# Altium PCB iNixie-Kit.pcbdoc
Units mm, origin at the board's own origin, x right, y up, seen from the top; angles counter-clockwise.
Board outline 73.3 x 71.5 mm, 2 copper layers (Top Layer, Bottom Layer); 77 components, 62 nets, 328 pads, 113 vias.
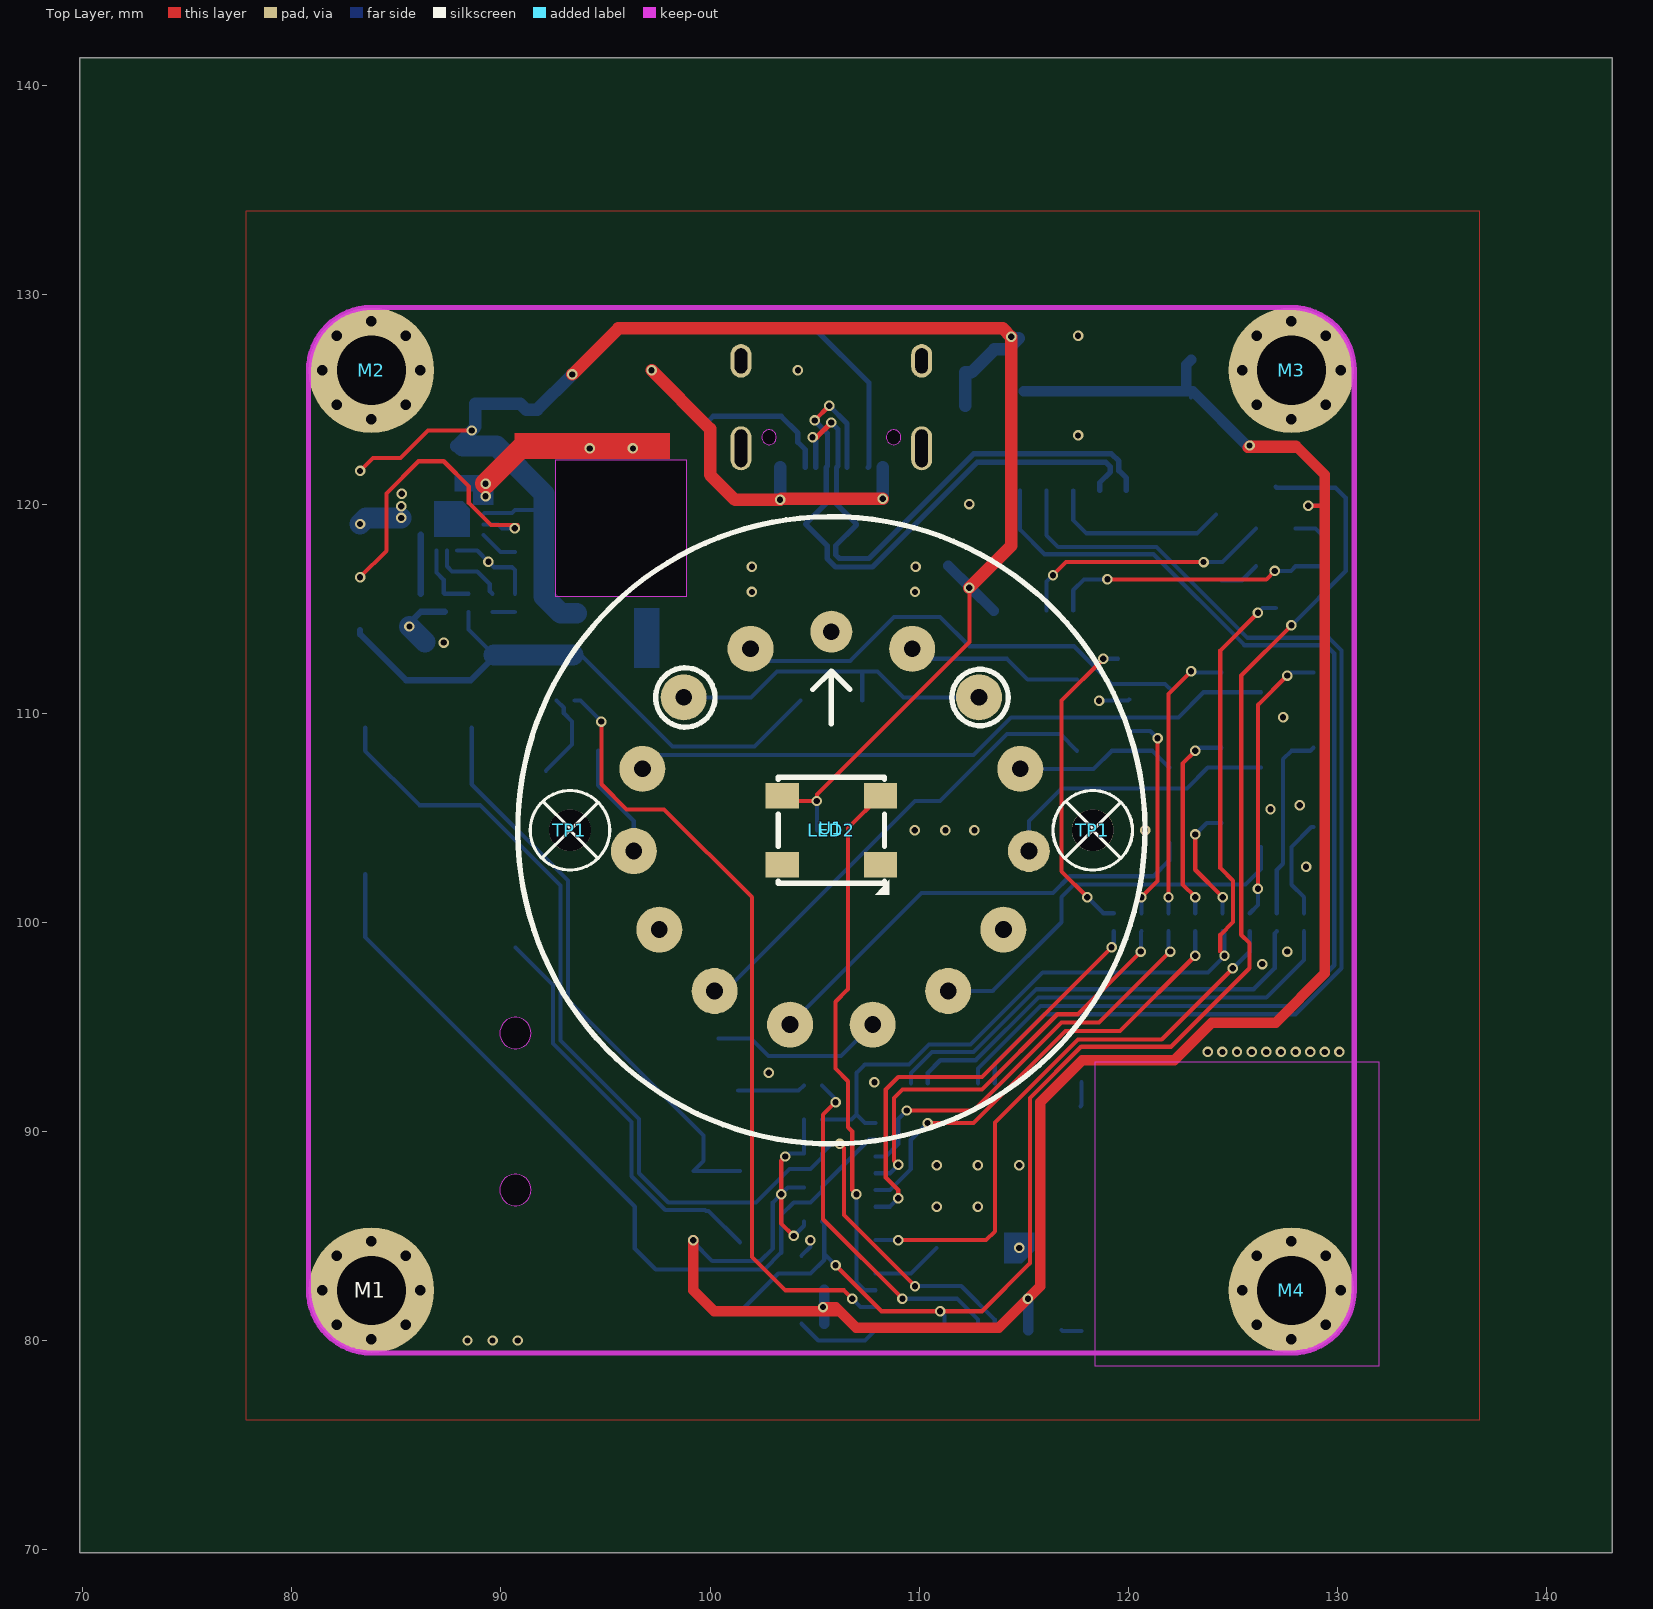
[diagram p0: Top Layer view]
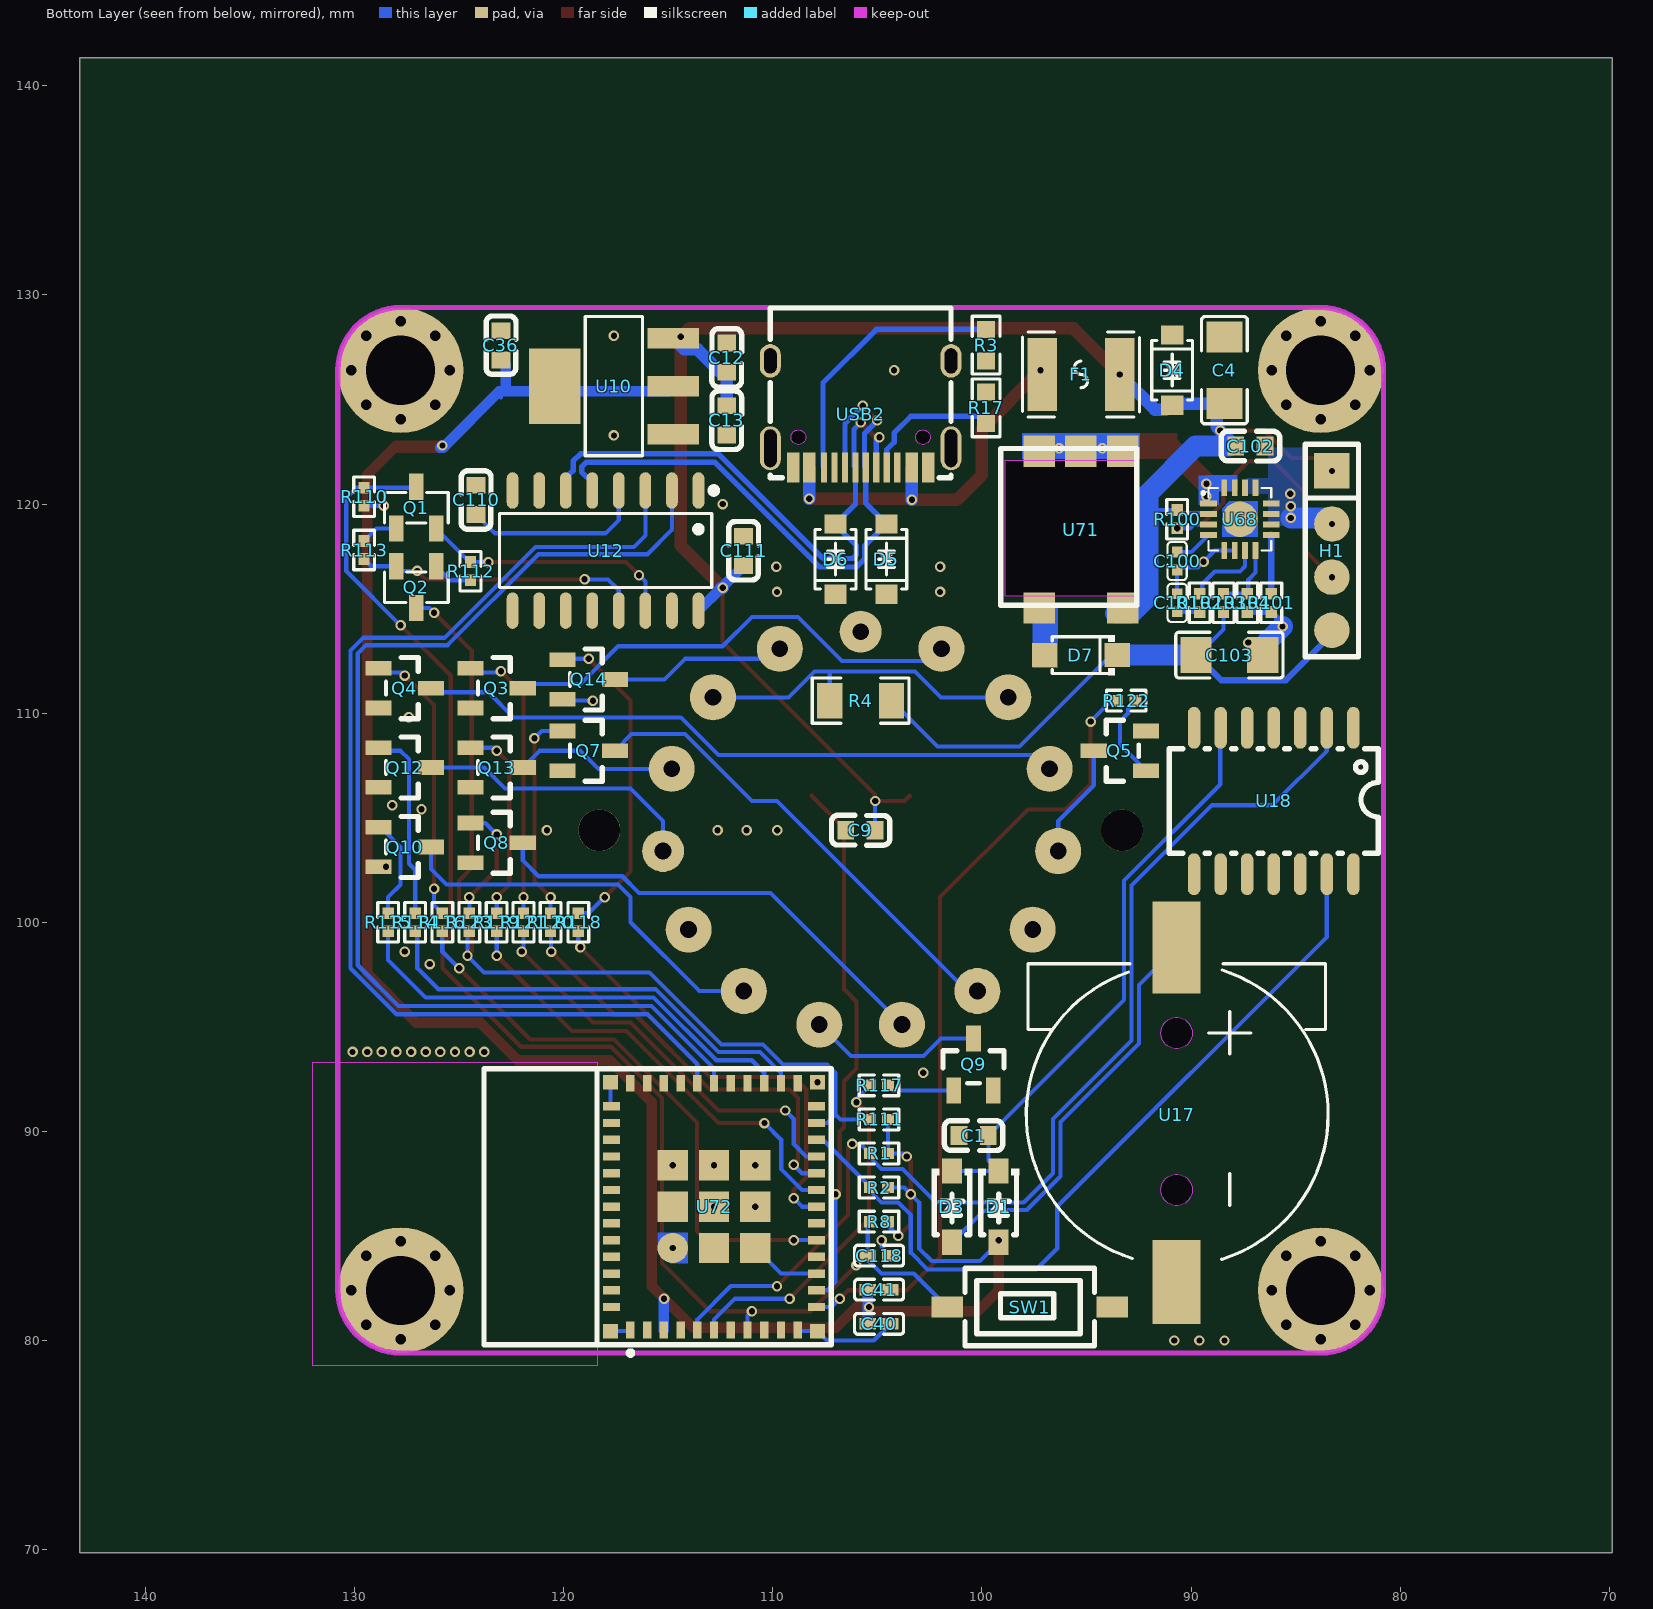
[diagram p1: Bottom Layer view, seen from below]

## Layer stack, top to bottom
Top Layer: signal copper (thickness not stored)
Dielectric: dielectric 0.32, FR-4, Dk 4.8
Bottom Layer: signal copper (thickness not stored)

## Board outline
143.15,69.85 69.85,69.85 69.85,141.35 143.15,141.35

## Components (designator, comment, footprint, x,y, rotation, side; value= is the part's Value field where it differs from the comment)
C1 "CL10A106MP8NNNC" C0603 100.392,89.8 r180 bottom
C4 "47uF" C1206 88.4,126.4 r270 bottom
C9 "0603B104K500NT" C0603 105.808,104.405 r0 bottom
C12 "0603B104K500NT" C0603 112.2,127 r90 bottom
C13 "0603B104K500NT" C0603 112.205,124 r270 bottom
C36 "CL10A106MP8NNNC" C0603 123,127.592 r270 bottom
C40 "CAP_0402" C0402#1 104.918,80.8 r0 bottom
C41 "CAP_0402" C0402#1 104.918,82.429 r0 bottom
C100 "C0402" C0402#2 90.664,117.276 r90 bottom
C101 "C0402" C0402#2 90.664,115.276 r270 bottom
C102 "CAP_0603" C0603 87.164,122.776 r0 bottom
C103 "CL31B105KBHNNNE" C1206 88.164,112.776 r0 bottom
C110 "CAP_0603" C0603 124.187,120.2 r90 bottom
C111 "CAP_0603" C0603 111.4,117.759 r270 bottom
C118 "22uf" C0402#1 104.918,84.057 r0 bottom
D1 "1N5819HW" SOD-123_L2.7-W1.6-LS3.7-RD-1 99.2,86.4 r270 bottom
D3 "1N5819HW" SOD-123_L2.7-W1.6-LS3.7-RD-1 101.432,86.4 r270 bottom
D4 "SMF5.0CA_C908214" SOD-123_L2.8-W1.8-LS3.7-BI 90.9,126.4 r270 bottom
D5 "SMF5.0CA_C908214" SOD-123_L2.8-W1.8-LS3.7-BI 104.571,117.362 r90 bottom
D6 "SMF5.0CA_C908214" SOD-123_L2.8-W1.8-LS3.7-BI 107,117.362 r90 bottom
D7 "E1J" SOD-123FL_L2.7-W1.8-LS3.7-RD 95.263,112.777 r0 bottom
F1 "1A自恢复保险丝" F1812 95.263,126.2 r0 bottom
H1 "HDR-M_2.54_1x4P" hdr-th_4p-p2.54-v-m 83.263,117.777 r270 bottom
LED2 "WS2812C" LED-SMD_4P-L5.0-W5.0-LS5.4-TL-1 105.8,104.4 r0 top
M1 "M3螺丝" 螺钉孔 83.8,82.4 r0 top
M2 "M3螺丝" 螺钉孔 83.8,126.4 r0 top
M3 "M3螺丝" 螺钉孔 127.8,126.4 r0 top
M4 "M3螺丝" 螺钉孔 127.8,82.4 r0 top
Q1 "SS8050_C2150" SOT-23-3_L2.9-W1.3-P1.90-LS2.4-BR 127.051,119.825 r270 bottom
Q2 "SS8050_C2150" SOT-23-3_L2.9-W1.3-P1.90-LS2.4-BR 127.051,116.025 r90 bottom
Q3 "A" SOT-23-3_L2.9-W1.6-P1.90-LS2.8-TR-CW 123.205,111.2 r0 bottom
Q4 "A" SOT-23-3_L2.9-W1.6-P1.90-LS2.8-TR-CW 127.6,111.2 r0 bottom
Q5 "A" SOT-23-3_L2.9-W1.6-P1.90-LS2.8-TR-CW 93.4,108.2 r180 bottom
Q7 "A" SOT-23-3_L2.9-W1.6-P1.90-LS2.8-TR-CW 118.8,108.2 r0 bottom
Q8 "A" SOT-23-3_L2.9-W1.6-P1.90-LS2.8-TR-CW 123.205,103.8 r0 bottom
Q9 "A" SOT-23-3_L2.9-W1.6-P1.90-LS2.8-TR-CW 100.4,93.2 r270 bottom
Q10 "A" SOT-23-3_L2.9-W1.6-P1.90-LS2.8-TR-CW 127.6,103.6 r0 bottom
Q12 "A" SOT-23-3_L2.9-W1.6-P1.90-LS2.8-TR-CW 127.6,107.4 r0 bottom
Q13 "A" SOT-23-3_L2.9-W1.6-P1.90-LS2.8-TR-CW 123.205,107.4 r0 bottom
Q14 "A" SOT-23-3_L2.9-W1.6-P1.90-LS2.8-TR-CW 118.8,111.612 r0 bottom
R1 "Res_0402" R0402 104.918,88.943 r180 bottom
R2 "Res_0402" R0402 104.918,87.314 r180 bottom
R3 "td03g5101bt" R0603 99.8,127.6 r90 bottom
R4 "6.8k" R1206 105.8,110.599 r180 bottom
R8 "Res_0402" R0402 104.918,85.686 r180 bottom
R17 "td03g5101bt" R0603 99.8,124.6 r270 bottom
R100 "Res_0402" R0402 90.664,119.276 r270 bottom
R101 "Res_0402" R0402 86.164,115.276 r270 bottom
R102 "Res_0402" R0402 89.588,115.276 r90 bottom
R103 "Res_0402" R0402 88.447,115.276 r270 bottom
R104 "Res_0402" R0402 87.305,115.276 r90 bottom
R110 "Res_0402" R0402 129.545,120.35 r90 bottom
R111 "Res_0402" R0402 104.918,90.571 r0 bottom
R112 "Res_0402" R0402 124.455,116.792 r90 bottom
R113 "Res_0402" R0402 129.545,117.8 r270 bottom
R114 "Res_0402" R0402 127.101,100 r90 bottom
R115 "Res_0402" R0402 128.396,100 r90 bottom
R116 "Res_0402" R0402 125.806,100 r90 bottom
R117 "Res_0402" R0402 104.918,92.2 r180 bottom
R118 "Res_0402" R0402 119.3,100 r90 bottom
R119 "Res_0402" R0402 123.205,100 r90 bottom
R120 "Res_0402" R0402 120.627,100 r90 bottom
R121 "Res_0402" R0402 121.922,100 r90 bottom
R122 "Res_0402" R0402 93.096,110.6 r180 bottom
R123 "Res_0402" R0402 124.511,100 r90 bottom
SW1 "Key_SMD_3.6x6.1x2.5" Key_SMD_3.6x6.1x2.5 97.711,81.6 r180 bottom
TP1 "M2螺丝" M2螺丝 93.3,104.4 r0 top
TP1 "M2螺丝" M2螺丝 118.3,104.4 r0 top
U1 "SD-01" SD-01 105.8,104.4 r90 top
U10 "AMS1117-3.3V" SOT-223-4_L6.5-W3.5-P2.30-LS7.0-BR 117.6,125.637 r180 bottom
U12 "CH340C" SOP-16_L10.0-W3.9-P1.27-LS6.0-BL 118,117.777 r0 bottom
U17 "CR1220-A" BAT-SMD_CR1220-2 90.69,90.8 r270 bottom
U18 "RX8025T-UC" SOIC-14_L10.1-W5.0-P1.27-LS7.4-BL 86.045,105.8 r0 bottom
U68 "TPS55340RTER" VQFN-16_L3.0-W3.0-P0.50-BL-EP1.7 87.664,119.276 r270 bottom
U71 "T3" T3 95.263,118.777 r90 bottom
U72 "ESP32-C3-MINI-1-H4_C2935306" WIFIM-SMD_ESP32-C3-MINI-1 112.81,86.4 r90 bottom
USB2 "typec-304-bcp16" USB-C-SMD_TYPEC-304-BCP16 105.8,124.3 r0 bottom

## Footprints (in the part's own frame and the unit in brackets; to place one, negate y for a bottom-side part, rotate by r counter-clockwise, add the part's x,y. Pads: shape width x height; smd on the part's side, far side on the other; paste and mask are expansions set on the pad)
BAT-SMD_CR1220-2 [mm]
  rect 4.4x2.3 smd: 1(-8,0)
  rect 4x2.3 smd: 2(8,0)
  Multi-Layer board cut-out: 3.6,-0.75 3.274,-0.676 3.013,-0.467 2.869,-0.167 2.869,0.167 3.013,0.468 3.274,0.676 3.6,0.75 3.6,0.75 3.925,0.676 4.186,0.468 4.331,0.167 4.331,-0.167 4.186,-0.467 3.925,-0.676 3.6,-0.75
  Multi-Layer board cut-out: -3.9,-0.75 -4.225,-0.676 -4.486,-0.467 -4.631,-0.167 -4.631,0.167 -4.486,0.468 -4.225,0.676 -3.9,0.75 -3.9,0.75 -3.575,0.676 -3.314,0.468 -3.169,0.167 -3.169,-0.167 -3.314,-0.467 -3.575,-0.676 -3.9,-0.75
  Multi-Layer keep-out region: 3.6,-0.75 3.274,-0.676 3.013,-0.467 2.869,-0.167 2.869,0.167 3.013,0.468 3.274,0.676 3.6,0.75 3.6,0.75 3.925,0.676 4.186,0.468 4.331,0.167 4.331,-0.167 4.186,-0.467 3.925,-0.676 3.6,-0.75
  Multi-Layer keep-out region: -3.9,-0.75 -4.225,-0.676 -4.486,-0.467 -4.631,-0.167 -4.631,0.167 -4.486,0.468 -4.225,0.676 -3.9,0.75 -3.9,0.75 -3.575,0.676 -3.314,0.468 -3.169,0.167 -3.169,-0.167 -3.314,-0.467 -3.575,-0.676 -3.9,-0.75
  silkscreen extent -7.22,-7.19 6.92,7.25
C0402#1 [mm]
  rect 0.79x0.54 smd: 1(-0.545,0) 2(0.545,0)
  silkscreen extent -1.17,-0.5 1.17,0.5
C0402#2 [mm]
  rect 0.508x0.508 smd: 1(-0.432,0) 2(0.432,0)
  silkscreen extent -0.91,-0.46 0.91,0.46
C0603 [mm]
  rect 0.8x0.9 smd: 1(-0.7,0) 2(0.7,0)
  silkscreen extent -1.41,-0.71 1.39,0.72
C1206 [mm]
  rect 1.485x1.728 smd: 1(-1.593,0) 2(1.593,0)
  silkscreen extent -2.56,-1.09 2.56,1.09
F1812 [mm]
  rect 1.407x3.499 smd: 1(-1.853,0) 2(1.853,0)
  silkscreen extent -2.79,-2.03 2.79,2.03
hdr-th_4p-p2.54-v-m [mm]
  rect 1.7x1.7 smd: 1(-3.81,0)
  round 1.7 smd: 2(-1.27,0) 3(1.27,0) 4(3.81,0)
  silkscreen extent -5.08,-1.27 5.08,1.27
Key_SMD_3.6x6.1x2.5 [mil]
  rect 59.1x39.4 smd: 1(-155.5,0) 2(155.5,0)
  silkscreen extent -122,-73 122,73
LED-SMD_4P-L5.0-W5.0-LS5.4-TL-1 [mm]
  rect 1.6x1.2 smd: 1(-2.35,1.65) 2(-2.35,-1.65) 3(2.35,-1.65) 4(2.35,1.65)
  silkscreen extent -2.54,-3.09 2.77,2.54
M2螺丝 [mm]
  round 2 hole 2: 1(0,0)
  silkscreen extent -1.9,-1.9 1.9,1.9
R0402 [mm]
  rect 0.566x0.54 smd: 1(-0.433,0) 2(0.433,0)
  silkscreen extent -0.94,-0.5 0.94,0.5
R0603 [mm]
  rect 0.806x0.864 smd: 1(-0.753,0) 2(0.753,0)
  silkscreen extent -1.39,-0.66 1.39,0.66
R1206 [mm]
  rect 1.208x1.701 smd: 1(-1.479,0) 2(1.479,0)
  silkscreen extent -2.31,-1.08 2.31,1.08
SD-01 [mm]
  round 2 hole 0.8: 1(9.5,0) 12(-0.993,-9.448)
  round 2.2 hole 0.8 copper offset 0,0: 2(8.68,3.864) 7(-7.686,5.584) 8(-9.292,1.975) 9(-9.292,-1.975) 13(2.936,-9.035) 15(8.679,-3.864)
  round 2.2 hole 0.8: 3(6.357,7.06) 4(2.936,9.035) 5(-0.993,9.448) 6(-4.75,8.227) 10(-7.686,-5.584) 11(-4.75,-8.227) 14(6.357,-7.06)
  silkscreen extent -15,-15 15,15
SOD-123_L2.7-W1.6-LS3.7-RD-1 [mm]
  rect 1.2x0.95 smd: 1(-1.7,0) 2(1.7,0)
  silkscreen extent -1.81,-0.98 1.35,0.98
SOD-123_L2.8-W1.8-LS3.7-BI [mm]
  rect 0.93x1.06 smd: 1(1.685,0) 2(-1.685,0)
  silkscreen extent -1.43,-0.98 1.43,0.98
SOD-123FL_L2.7-W1.8-LS3.7-RD [mm]
  rect 1.2x1.15 smd: 1(-1.735,0) 2(1.735,0)
  silkscreen extent -1.6,-0.95 1.38,0.95
SOIC-14_L10.1-W5.0-P1.27-LS7.4-BL [mm]
  oval 0.6x2 smd: 1(-3.81,-3.5) 2(-2.54,-3.5) 3(-1.27,-3.5) 4(0,-3.5) 5(1.27,-3.5) 6(2.54,-3.5) 7(3.81,-3.5) 8(3.81,3.5) 9(2.54,3.5) 10(1.27,3.5) 11(0,3.5) 12(-1.27,3.5) 13(-2.54,3.5) 14(-3.81,3.5)
  silkscreen extent -5,-2.5 5,2.5
SOP-16_L10.0-W3.9-P1.27-LS6.0-BL [mm]
  oval 0.56x1.745 smd: 1(-4.445,-2.872) 2(-3.175,-2.872) 3(-1.905,-2.872) 4(-0.635,-2.872) 5(0.635,-2.872) 6(1.905,-2.872) 7(3.175,-2.872) 8(4.445,-2.872) 9(4.445,2.872) 10(3.175,2.872) 11(1.905,2.872) 12(0.635,2.872) 13(-0.635,2.872) 14(-1.905,2.872) 15(-3.175,2.872) 16(-4.445,2.872)
  silkscreen extent -5.33,-3.02 5.08,1.77
SOT-23-3_L2.9-W1.3-P1.90-LS2.4-BR [mm]
  rect 1.25x0.7 smd: 1(1,-0.95) 2(1,0.95) 3(-1,0)
  silkscreen extent -0.73,-1.53 0.73,1.53
SOT-23-3_L2.9-W1.6-P1.90-LS2.8-TR-CW [mm]
  rect 1.25x0.7 smd: 1(1.25,0.95) 2(1.25,-0.95) 3(-1.25,0)
  silkscreen extent -0.65,-1.46 0.9,1.46
SOT-223-4_L6.5-W3.5-P2.30-LS7.0-BR [mm]
  rect 2.47x0.98 smd: 1(2.835,-2.3) 2(2.835,0) 3(2.835,2.3)
  rect 2.47x3.6 smd: 4(-2.835,0)
  silkscreen extent -1.37,-3.33 1.37,3.33
T3 [mm]
  rect 1.5x1.5 smd: 1(3.75,2) 2(-3.75,-2) 3(3.75,0.006) 4(-3.75,2) 5(3.75,-2)
  Multi-Layer board cut-out: -3.178,-2.67 -3.178,3.63 3.322,3.63 3.322,-2.67
  Multi-Layer keep-out region: -3.178,-2.67 -3.178,3.63 3.322,3.63 3.322,-2.67
  silkscreen extent -3.62,-2.67 3.88,3.83
USB-C-SMD_TYPEC-304-BCP16 [mil]
  oval 39.4x82.7 hole 23.6 slot 70.9 at 90 deg: 13(-170.1,64.3) 14(170.1,64.3)
  oval 39.4x63 hole 23.6 slot 47.2 at 90 deg: 15(-170.1,-100.3) 16(170.1,-100.3)
  rect 23.6x57.1 smd: A1B12(-127,100.3) A4B9(-96.5,100.3) B1A12(126.8,100.3) B4A9(96.5,100.3)
  rect 11.8x57.1 smd: A5(-49.2,100.3) A6(-9.8,100.3) A7(9.8,100.3) A8(49.2,100.3) B5(68.9,100.3) B6(29.5,100.3) B7(-29.5,100.3) B8(-68.9,100.3)
  Multi-Layer board cut-out: 131.1,43.4 129.73,37.41 125.9,32.61 120.37,29.95 114.23,29.95 108.7,32.61 104.87,37.41 103.5,43.4 103.5,43.4 104.87,49.39 108.7,54.19 114.23,56.85 120.37,56.85 125.9,54.19 129.73,49.39 131.1,43.4
  Multi-Layer board cut-out: -103.5,43.4 -104.87,37.41 -108.7,32.61 -114.23,29.95 -120.37,29.95 -125.9,32.61 -129.73,37.41 -131.1,43.4 -131.1,43.4 -129.73,49.39 -125.9,54.19 -120.37,56.85 -114.23,56.85 -108.7,54.19 -104.87,49.39 -103.5,43.4
  Multi-Layer keep-out region: 131.1,43.4 129.73,37.41 125.9,32.61 120.37,29.95 114.23,29.95 108.7,32.61 104.87,37.41 103.5,43.4 103.5,43.4 104.87,49.39 108.7,54.19 114.23,56.85 120.37,56.85 125.9,54.19 129.73,49.39 131.1,43.4
  Multi-Layer keep-out region: -103.5,43.4 -104.87,37.41 -108.7,32.61 -114.23,29.95 -120.37,29.95 -125.9,32.61 -129.73,37.41 -131.1,43.4 -131.1,43.4 -129.73,49.39 -125.9,54.19 -120.37,56.85 -114.23,56.85 -108.7,54.19 -104.87,49.39 -103.5,43.4
  silkscreen extent -170,-200 170,120
VQFN-16_L3.0-W3.0-P0.50-BL-EP1.7 [mm]
  rect 0.28x0.8 smd: 1(-0.749,-1.5) 2(-0.249,-1.5) 3(0.249,-1.5) 4(0.749,-1.5) 9(0.749,1.5) 10(0.249,1.5) 11(-0.249,1.5) 12(-0.749,1.5)
  rect 0.8x0.28 smd: 5(1.5,-0.749) 6(1.5,-0.249) 7(1.5,0.249) 8(1.5,0.749) 13(-1.5,0.749) 14(-1.5,0.249) 15(-1.5,-0.249) 16(-1.5,-0.749)
  round 1.7 smd: 17(0,0)
  Top Layer region: -0.85,-0.5 -0.85,0.85 0.85,0.85 0.85,-0.85 -0.5,-0.85
  silkscreen extent -1.5,-1.76 1.5,1.5
WIFIM-SMD_ESP32-C3-MINI-1 [mm]
  rect 0.8x0.4 smd: 1(-5.9,4) 2(-5.9,3.2) 3(-5.9,2.4) 4(-5.9,1.6) 5(-5.9,0.8) 6(-5.9,0) 7(-5.9,-0.8) 8(-5.9,-1.6) 9(-5.9,-2.4) 10(-5.9,-3.2) 11(-5.9,-4) 25(5.9,-4) 26(5.9,-3.2) 27(5.9,-2.4) 28(5.9,-1.6) 29(5.9,-0.8) 30(5.9,0) 31(5.9,0.8) 32(5.9,1.6) 33(5.9,2.4) 34(5.9,3.2) 35(5.9,4)
  rect 0.4x0.8 smd: 12(-4.8,-4.9) 13(-4,-4.9) 14(-3.2,-4.9) 15(-2.4,-4.9) 16(-1.6,-4.9) 17(-0.8,-4.9) 18(0,-4.9) 19(0.8,-4.9) 20(1.6,-4.9) 21(2.4,-4.9) 22(3.2,-4.9) 23(4,-4.9) 24(4.8,-4.9) 36(4.8,4.9) 37(4,4.9) 38(3.2,4.9) 39(2.4,4.9) 40(1.6,4.9) 41(0.8,4.9) 42(0,4.9) 43(-0.8,4.9) 44(-1.6,4.9) 45(-2.4,4.9) 46(-3.2,4.9) 47(-4,4.9) 48(-4.8,4.9)
  rect 1.45x1.45 smd: 49(-1.975,-1.975) 49(-1.975,0) 49(0,-1.975) 49(0,0) 49(0,1.975) 49(1.975,-1.975) 49(1.975,0) 49(1.975,1.975)
  round 1.45 smd: 49(-1.975,1.975)
  rect 0.7x0.7 smd: 50(5.95,4.95) 51(5.95,-4.95) 52(-5.95,-4.95) 53(-5.95,4.95)
  Top Layer region: -2.7,2.1 -2.1,2.7 -1.25,2.7 -1.25,1.25 -2.7,1.25
  silkscreen extent -7.1,-5.6 6.6,11
螺钉孔 [mm]
  round 6 hole 3.302: 1(0,0)
  round 1 hole 0.5: 2(0,2.349) 3(0,-2.35) 4(2.349,0) 5(-2.35,0) 6(1.651,1.651) 7(-1.651,-1.651) 8(1.651,-1.651) 9(-1.651,1.651)

## Via types
v1: diameter 0.5, hole 0.3, Top Layer to Bottom Layer, 113 vias

## Nets (pads, with @x,y where several pads share a name; then routed paths per layer and width w, separated by ;. In a path a pad name is that pad's centre, name@x,y a point inside that pad or via, vN(x,y) a via of type N, cw(c..) or ccw(c..) an arc to the next point about the centre after c; other vN are vias at no path point)
$1N272: C1.2 D1.1 D3.1 U18.6 | length 28.2
  Bottom Layer w0.2: U18.6 88.6,109.285 88.6,106.6 93.2,102 93.2,96.292 C1.2 99.692,88.592 D1.1 D3.1
$1N3351: D3.2 U17.1 | length 19.7
  Bottom Layer w0.2: U17.1 92.495,96.994 92.495,94.206 96.248,90.454 96.248,87.854 97.854,86.248 99.752,86.248 99.8,86.2 99.932,86.2 D3.2
$1N18606: F1.2 USB2.A4B9 USB2.B4A9 | length 18
  Top Layer w0.6: v1(97.2,126.4) 100,123.6 100,121.4 101.2,120.2 v1(103.349,120.2) 103.4,120.251 v1(108.251,120.251)
  Bottom Layer w0.6: v1(103.349,120.2) USB2.A4B9 ; v1(108.251,120.251) USB2.B4A9@108.251,121.751
$1N54126: C110.1 U12.4 | length 8.9
  Bottom Layer w0.2: U12.4 117.365,119.235 118,118.6 123.287,118.6 C110.1
$1N54151: Q2.1 R112.1 | length 1.9
  Bottom Layer w0.2: R112.1 125.435,116.359 Q2.1
$1N54152: Q1.1 R113.1 | length 1.8
  Bottom Layer w0.2: Q1.1 128.953,118.825 R113.1
$2N51628: Q10.3 U1.10 | length 19.1
  Bottom Layer w0.2: U1.10 113.514,96.714 116.8,100 116.8,101.2 117.4,101.8 125.6,101.8 126.35,102.55 Q10.3
$2N54349: Q3.3 U1.2 | length 22.5
  Bottom Layer w0.2: U1.2 102.516,112.5 106.7,112.5 108.8,114.6 111,114.6 112.4,113.2 117.4,113.2 119.2,111.4 121.755,111.4 Q3.3
$2N54351: Q4.3 U1.4 | length 31.1
  Bottom Layer w0.2: U1.4@96.765,107.336 97.429,108 112.6,108 114.4,109.8 122.4,109.8 123.6,111 Q4.3@126.35,111
$2N54353: Q5.3 U1.5 | length 5.5
  Bottom Layer w0.2: Q5.3 94.65,106.55 96.352,104.848 U1.5
$2N54355: Q7.3 U1.7 | length 22.8
  Bottom Layer w0.2: U1.7 100.714,96.714 109.8,105.8 111,105.8 114.2,109 116.75,109 Q7.3
$2N54357: Q8.3 U1.8 | length 22.2
  Bottom Layer w0.2: U1.8 110.117,101.4 116.4,101.4 117.2,102.2 121.2,102.2 121.955,102.955 Q8.3
$2N54359: Q9.3 U1.9 | length 8.4
  Bottom Layer w0.2: Q9.3 101.95,94.45 102.8,93.6 106.267,93.6 U1.9
$2N54361: Q12.3 U1.12 | length 13.6
  Bottom Layer w0.2: U1.12 115.248,104.848 116.8,106.4 122.8,106.4 123.8,107.4 Q12.3
$2N54363: Q13.3 U1.13 | length 7.8
  Bottom Layer w0.2: U1.13 118.342,107.336 119.206,108.2 121.155,108.2 Q13.3
$2N54365: Q14.3 U1.15 | length 8.5
  Bottom Layer w0.2: U1.15 110.143,112.6 114.2,112.6 115.188,111.612 Q14.3
$2N56740: R4.1 U1.3 U1.14 | length 16.6
  Bottom Layer w0.2: U1.3 101.957,110.757 103.2,112 107.229,112 ; R4.1 107.279,111.951 107.229,112 ; U1.14 109.243,110.757 108,112 107.229,112
$4N509: R101.1 U68.9 | length 2.8
  Bottom Layer w0.3: R101.1 U68.9
$4N511: C101.2 R102.1 | length 1.1
  Bottom Layer w0.2: R102.1 C101.2
$4N513: R102.2 U68.7 | length 3.7
  Bottom Layer w0.2: U68.7 87.414,117.026 87.663,116.777 88.863,116.777 89.463,116.177 89.463,115.834 R102.2
$4N515: C100.2 U68.4 | length 1.8
  Bottom Layer w0.2: U68.4 89.982,117.708 C100.2
$4N550: R103.1 R104.2 U68.8 | length 3.4
  Bottom Layer w0.2: U68.8 86.914,116.726 87.263,116.377 87.263,115.751 R104.2 R103.1
$4N558: D7.2 U71.4
$4N560: U68.1 U68.15 U68.16 U71.1 U71.3 | length 2.9
  Top Layer w1: v1(89.263,120.977) 91.063,122.777 91.463,122.777
  other v1: 89.263,120.377 94.247,122.661 96.312,122.661
+3.3V: C36.2 C40.2 C41.2 D1.2 R1.2 R2.2 R8.2 R110.1 R111.1 U10.2 U10.4 U72.3 | length 112.1
  Top Layer w0.2: v1(103.6,88.8) 103.4,88.6 v1(103.4,87) 103.4,85.6 v1(104,85) ; v1(128.6,119.917) 129.329,119.917 129.4,119.846
  Top Layer w0.5: v1(99.2,84.8) 99.2,82.4 100.2,81.4 106.2,81.4 ; v1(105.4,81.6) 106,81.6 106.2,81.4 ; 106.2,81.4 107,80.6 113.8,80.6 v1(115.2,82) 115.8,82.6 115.8,91.4 117.8,93.4 122.2,93.4 124,95.2 127.045,95.2 129.4,97.555 129.4,119.846 129.4,121.4 128.1,122.7 ; 128.1,122.7 125.7,122.7 v1(125.8,122.8) 128,122.8 128.1,122.7
  Bottom Layer w0.2: D1.2 100.1,83.8 102.4,83.8 103,84.4 103,86.6 v1(103.4,87) 103.714,87.314 R2.2 ; v1(103.6,88.8) 103.743,88.943 R1.2 R111.1 ; v1(104,85) 104.486,85.486 R8.2 ; 122.995,125.1 123,125.105 123,125.4 ; v1(128.6,119.917) R110.1
  Bottom Layer w0.5: D1.2 v1(99.2,84.8) ; v1(105.4,81.6) 105.4,81.588 v1@105.464,81.525 ; C40.2 v1@105.464,81.525 ; C41.2 v1@105.464,81.525 ; U10.2@115.004,125.4 120.674,125.4 122.774,125.4 ; v1(115.2,82) 115.21,81.99 U72.3 ; C36.2 122.774,126.666 122.774,125.4 ; v1(125.8,122.8) 125.9,122.7 125.773,122.7 123.073,125.4 123,125.4 122.774,125.4
+5V: C4.2 C9.1 C12.1 C13.1 C102.2 C111.2 D4.1 F1.1 H1.1 LED2.1 R100.1 U10.3 U12.16 U68.2 U71.2 | length 88.3
  Top Layer w0.2: v1(83.263,121.587) 83.877,122.2 85.2,122.2 86.517,123.517 v1(88.604,123.517) ; LED2.1 103.7,105.8 v1(105.108,105.8) 105.108,106.108 112.4,113.4 v1(112.4,116)
  Top Layer w0.6: v1(93.41,126.2) 95.61,128.4 114,128.4 v1(114.4,128) 114.4,118 v1(112.4,116)
  Bottom Layer w0.2: U68.2 89.215,119.577 90.531,119.577 R100.1 91.939,119.709 92.063,119.585 ; C9.1 v1(105.108,105.8)
  Bottom Layer w0.5: C111.2 112.477,115.982 U12.16
  Bottom Layer w0.6: C102.2 88.774,123.687 88.774,124.807 90.915,124.807 91.207,124.515 91.725,124.515 v1(93.41,126.2) ; C13.1 112.2,124.705 C12.1 112.5,126.3 113.6,127.4 114.228,127.4 U10.3 114.463,127.938 v1(114.4,128) ; v1(112.4,116) 112.418,115.982 v1@112.477,115.982
  Bottom Layer w1: C102.2@88.184,122.776 89.779,122.776 92.063,120.492 92.063,119.585 92.063,115.577 92.863,114.777 U71.2@93.614,114.777
CC1: R17.2 USB2.A5 | length 6.7
  Bottom Layer w0.254: R17.2 100.153,124.2 103.4,124.2 104.2,123.4 104.2,122.955 104.55,122.605 USB2.A5
CC2: R3.2 USB2.B5 | length 12.9
  Bottom Layer w0.254: R3.2 105.047,128.353 107.6,125.8 107.6,121.802 USB2.B5
CHIP_EN: C118.2 Q1.3 R8.1 R110.2 SW1.1 U72.8 | length 68.8
  Top Layer w0.2: v1(106,83.6) 108.2,81.4 v1(111,81.4) 113,81.4 115.298,83.698 115.298,91.599 117.746,94.048 122.048,94.048 125.8,97.8 125.8,99 125.4,99.4 125.4,111.8 v1(127.8,114.2)
  Bottom Layer w0.2: SW1.1 103.26,83.2 104.8,83.2 105.464,83.864 C118.2 ; R8.1 105.464,85.573 C118.2 ; v1(106,83.6) 105.543,84.057 C118.2 ; v1(111,81.4) 111.21,81.19 U72.8 ; Q1.3 127.093,120.782 R110.2 129.915,120.782 130.4,120.298 130.4,116.8 v1(127.8,114.2)
D+: D5.1 U12.5 USB2.A6 USB2.B6 | length 29.3
  Top Layer w0.2: v1(105,124) v1(105.7,124.7)
  Bottom Layer w0.2: v1@105.6,124.7 v1(105.7,124.7)
  Bottom Layer w0.254: v1(105,124) 105.62,123.38 105.62,121.821 USB2.A6 105.551,120.027 D5.1 105.6,118.018 105.6,117.4 106.006,116.994 107.768,116.994 112.568,121.794 ; v1(105.7,124.7) 106.549,123.851 USB2.B6 ; 112.6,121.794 112.568,121.794 ; U12.5 118.635,121.035 119.141,121.541 119.141,121.778 118.925,121.994 112.768,121.994 112.568,121.794
D-: D6.1 U12.6 USB2.A7 USB2.B7 | length 27.4
  Top Layer w0.254: v1(104.9,123.2) 105.1,123.2 v1(105.8,123.9)
  Bottom Layer w0.254: v1(104.9,123.2) 105.051,123.049 USB2.B7 ; v1(105.8,123.9) 106.12,123.58 106.12,121.823 USB2.A7 106.049,119.998 D6.1 107,119 106.006,118.006 106.006,117.575 106.181,117.4 107.6,117.4 112.6,122.4 119.2,122.4 119.547,122.053 119.547,121.6 119.905,121.242 U12.6
DTR: Q2.2 R113.2 U12.13 | length 13.8
  Top Layer w0.2: v1(119,116.4) 126.6,116.4 v1(127,116.8)
  Bottom Layer w0.2: U12.13 117.365,115.877 117.888,116.4 v1(119,116.4) ; v1(127,116.8) 127.776,116.8 Q2.2 129.203,117.025 R113.2
ESP32_TX: U12.3 U72.31 | length 53.1
  Bottom Layer w0.2: U72.31 113.61,93.21 116,95.6 128,95.6 130.2,97.8 130.2,113 129.597,113.603 125.695,113.603 121.346,117.952 116.648,117.952 116.095,118.505 U12.3
ESP33_RX: U12.2 U72.30 | length 54.1
  Bottom Layer w0.2: U72.30 112.81,93.01 115.8,96 127.902,96 129.848,97.946 129.848,112.854 129.451,113.251 125.549,113.251 121.2,117.6 116,117.6 114.825,118.775 U12.2
GATE: H1.3 R100.2 U68.3 | length 14.7
  Top Layer w0.2: v1(83.263,116.507) 84.52,117.763 84.52,120.503 86.063,122.047 87.263,122.047 88.463,120.847 88.463,120.047 89.518,118.992 v1@90.794,118.992
  Bottom Layer w0.2: U68.3 89.863,119.027 90.047,118.844 v1(90.664,118.844)
GND: C1.1 C4.1 C9.2 C12.2 C13.2 C36.1 C40.1 C41.1 C100.1 C101.1 C102.1 C103.1 C110.2 C111.1 C118.1 D4.2 D5.2 D6.2 H1.2 LED2.3 Q3.1 Q4.1 Q5.1 Q7.1 Q8.1 Q9.1 Q10.1 Q12.1 Q13.1 Q14.1 R3.1 R17.1 R101.2 R104.1 SW1.2 U10.1 U12.1 U17.2 U18.11 U68.5 U68.6 U68.10 U68.11 U68.12 U68.13 U68.14 U72.1 U72.2 U72.11 U72.14 U72.36 U72.37 U72.38 U72.39 U72.40 U72.41 U72.42 U72.43 U72.44 U72.45 U72.46 U72.47 U72.48 U72.49 U72.50 U72.51 U72.52 U72.53 USB2.A1B12 USB2.B1A12 | length 22.4
  Bottom Layer w0.2: U68.6 U68.5 88.864,117.776 v1(89.401,117.239) 89.663,116.977 90.532,116.977 C100.1 C101.1 ; C40.1 105.173,80 107.41,80 U72.52 108.76,80.45 U72.11 ; C118.1 104.8,84.484 v1(104.8,84.8) ; U72.14 109.61,83.2 U72.49@110.834,84.425 ; U72.1 116.86,80.45 U72.53 ; U72.36 117.76,91.25 U72.50 ; v1(118.6,110.6) 119.987,110.6 120.035,110.648 Q14.1@120.05,110.648
  Bottom Layer w0.3: v1(85.624,114.146) 85.624,114.305 R101.2 R104.1
  Bottom Layer w1: v1(83.263,119.047) 83.554,119.337 v1(85.232,119.337) ; v1(85.624,114.146) C103.1@86.364,113.406
  other v1: 88.4,80 89.6,80 90.8,80 114.785,84.425 110.834,86.4 112.81,86.4 110.834,88.375 112.81,88.375 114.785,88.375 107.86,92.35 102.8,92.8 123.8,93.8 124.5,93.8 125.199,93.8 125.899,93.8 126.598,93.8 127.298,93.8 127.998,93.8 128.697,93.8 129.397,93.8 130.097,93.8 126.4,98 127.6,98.6 128.5,102.65 109.794,104.401 111.256,104.401 112.643,104.401 120.8,104.4 126.8,105.4 128.2,105.6 127.4,109.8 87.263,113.377 102,115.8 109.8,115.8 102,117 109.828,117 85.232,119.898 112.4,120 85.25,120.496 117.6,123.281 104.2,126.4 117.6,128.047
GPIO0: R122.1 U72.12 | length 38.2
  Top Layer w0.2: v1(94.8,109.6) 94.8,106.6 96,105.4 97.8,105.4 102,101.2 102,84 103.6,82.4 106.4,82.4 v1(106.8,82)
  Bottom Layer w0.2: R122.1 93.8,110.6 v1(94.8,109.6) ; v1(106.8,82) 107.2,81.6 U72.12
GPIO1: LED2.4 U72.13 | length 25.6
  Top Layer w0.2: v1(107,87) 106.8,87.2 106.8,90 106.6,90.2 106.6,92.4 106,93 106,96.2 106.6,96.8 106.6,104.5 LED2.4
  Bottom Layer w0.2: v1(107,87) 107,82.8 107.4,82.4 U72.13
GPIO2: R1.1 U18.2 U72.5 | length 53.1
  Top Layer w0.2: v1(106.2,89.4) 106.4,89.2 106.4,86 v1(109.8,82.6)
  Bottom Layer w0.2: U18.2 83.505,108.2 86.105,105.6 89,105.6 92.848,101.752 92.848,94.352 96.6,90.6 96.6,88 98,86.6 102.2,86.6 103.8,88.2 104.8,88.2 105.351,88.751 R1.1 105.808,89.4 v1(106.2,89.4) ; v1(109.8,82.6) 112.01,82.6 113.61,81 U72.5
GPIO3: R117.1 U72.6 | length 16.8
  Top Layer w0.2: v1(106,91.4) 105.4,90.8 105.4,85.8 v1(109.2,82)
  Bottom Layer w0.2: R117.1 106,91.551 v1(106,91.4) ; v1(109.2,82) 111.81,82 112.81,81 U72.6
GPIO4: R118.1 U72.18 | length 21.1
  Top Layer w0.2: v1(109,86.8) 109,87.2 108.4,87.8 108.4,92 109,92.6 113,92.6 v1(119.2,98.8)
  Bottom Layer w0.2: U72.18 108.6,86.4 v1(109,86.8) ; v1(119.2,98.8) 119.3,98.9 R118.1
GPIO5: R119.1 U72.19 | length 21.9
  Top Layer w0.2: v1(110.4,90.4) 112.6,90.4 117,94.8 119.6,94.8 v1(123.2,98.4)
  Bottom Layer w0.2: U72.19 108.6,87.2 109.6,88.2 109.6,89.6 v1(110.4,90.4) ; v1(123.2,98.4) 123.205,98.405 R119.1
GPIO6: R120.1 U72.20 | length 20.2
  Top Layer w0.2: v1(109,88.4) 108.8,88.6 108.8,91.6 109.2,92 113,92 116.6,95.6 117.6,95.6 v1(120.6,98.6)
  Bottom Layer w0.2: U72.20 108.6,88 v1(109,88.4) ; v1(120.6,98.6) 120.6,99.54 R120.1
GPIO7: R121.1 U72.21 | length 19.9
  Top Layer w0.2: v1(109.4,91) 112.6,91 116.8,95.2 118.6,95.2 v1(122,98.6)
  Bottom Layer w0.2: U72.21 108.41,88.8 109,89.39 109,90.6 v1(109.4,91) ; R121.1 121.922,98.678 v1(122,98.6)
GPIO8: R2.1 U18.13 U72.22 | length 38.9
  Bottom Layer w0.2: U18.13 83.505,99.295 96.4,86.4 96.4,84.4 97.4,83.4 102.6,83.4 103.4,84.2 103.4,86 104,86.6 104.8,86.6 105.351,87.151 R2.1 105.351,87.351 107.6,89.6 U72.22
GPIO9: Q2.3 R111.2 R123.1 U72.23 | length 44.6
  Top Layer w0.2: v1@124.6,98.4 124.4,98.6 124.4,99.4 125.014,100.014 125.014,101.986 124.4,102.6 124.4,113 v1(126.2,114.8)
  Bottom Layer w0.2: R111.2 106.762,90.571 107,90.81 ; U72.23 107.41,90.4 107,90.81 ; R123.1 124.6,99.479 v1(124.6,98.395) 123.805,97.6 115.905,97.6 112.457,94.152 110.464,94.152 109.511,93.2 107.4,93.2 107,92.8 107,90.81 ; v1(126.2,114.8) 126.425,115.025 Q2.3
GPIO10: R116.1 U72.16 | length 27.6
  Top Layer w0.2: v1(109,84.8) 113.2,84.8 113.621,85.221 113.621,90.421 117.6,94.4 121.6,94.4 v1(125,97.8)
  Bottom Layer w0.2: U72.16 v1(109,84.8) ; v1(125,97.8) 125.806,98.606 R116.1
GPIO18: R114.1 U72.26 | length 21.8
  Bottom Layer w0.2: U72.26 109.61,92.8 110.61,93.8 112.603,93.8 115.603,96.8 126,96.8 127,97.8 127,99.466 R114.1
GPIO19: R115.1 U72.27 | length 22.1
  Bottom Layer w0.2: U72.27 110.41,92.8 111.01,93.4 112.702,93.4 115.702,96.4 126.6,96.4 128.4,98.2 128.4,99.563 R115.1
HV1: C103.2 D7.1 H1.4 R4.2 R103.2 | length 28
  Bottom Layer w0.2: R103.2 88.447,114.002 C103.2@89.672,112.777 ; D7.1 93.823,112.777 98.2,108.4 102.123,108.4 R4.2
  Bottom Layer w0.3: H1.4 83.263,113.777 85.463,111.577 88.556,111.577 C103.2
  Bottom Layer w1: C103.2@89.672,112.777 D7.1@93.445,112.777
O0: Q12.2 R114.2 | length 9.2
  Bottom Layer w0.2: R114.2 127.101,102.501 127.4,102.8 127.4,107.8 127.8,108.2 128.7,108.2 Q12.2
O1: Q10.2 R115.2 | length 4.9
  Bottom Layer w0.2: R115.2 128.396,101.2 127.8,101.796 127.8,103.6 128.75,104.55 Q10.2
O2: Q4.2 R116.2 | length 13.4
  Top Layer w0.2: v1(126.2,101.6) 126.2,110.4 v1(127.6,111.8)
  Bottom Layer w0.2: R116.2 126.2,100.827 v1(126.2,101.6) ; v1(127.6,111.8) 127.75,111.95 Q4.2@128.85,111.95
O3: Q9.2 R117.2 | length 3.2
  Bottom Layer w0.2: Q9.2 104.236,91.95 R117.2
O4: Q14.2 R118.2 | length 15
  Top Layer w0.2: v1(118.038,101.2) 116.8,102.437 116.8,110.6 v1(118.8,112.6)
  Bottom Layer w0.2: v1(118.038,101.2) 118.805,100.433 R118.2 ; v1(118.8,112.6) Q14.2@119.512,112.6
O5: Q13.2 R119.2 | length 9.6
  Top Layer w0.2: v1(123.2,108.2) 122.6,107.6 122.6,101.805 v1(123.205,101.2)
  Bottom Layer w0.2: v1(123.2,108.2) 123.35,108.35 Q13.2 ; R119.2 v1(123.205,101.2)
O6: Q7.2 R120.2 | length 10.2
  Top Layer w0.2: v1(120.627,101.2) 121.4,101.973 v1(121.4,108.8)
  Bottom Layer w0.2: Q7.2 121.05,109.15 v1(121.4,108.8) ; R120.2 v1(120.627,101.2)
O7: Q3.2 R121.2 | length 13.5
  Top Layer w0.2: v1(121.922,101.2) 121.922,110.922 v1(123,112)
  Bottom Layer w0.2: R121.2 v1(121.922,101.2) ; v1(123,112) 123.05,111.95 Q3.2@124.455,111.95
O8: Q5.2 R122.2 | length 4.2
  Bottom Layer w0.2: Q5.2 93.4,108.5 93.4,109.6 93,110 93,110.263 R122.2
O9: Q8.2 R123.2 | length 5.8
  Top Layer w0.2: v1(123.2,104.2) 123.2,102.511 v1(124.511,101.2)
  Bottom Layer w0.2: v1(123.2,104.2) 123.75,104.75 Q8.2 ; R123.2 v1(124.511,101.2)
RTS: Q1.2 R112.2 U12.14 | length 12.4
  Top Layer w0.2: v1(116.4,116.6) 117.025,117.225 v1(123.6,117.225)
  Bottom Layer w0.2: U12.14 116.095,116.295 v1(116.4,116.6) ; v1(123.6,117.225) R112.2 124.501,117.225 Q1.2
"": LED2.2 M1.1 M1.2 M1.3 M1.4 M1.5 M1.6 M1.7 M1.8 M1.9 M2.1 M2.2 M2.3 M2.4 M2.5 M2.6 M2.7 M2.8 M2.9 M3.1 M3.2 M3.3 M3.4 M3.5 M3.6 M3.7 M3.8 M3.9 M4.1 M4.2 M4.3 M4.4 M4.5 M4.6 M4.7 M4.8 M4.9 TP1.1 U1.1 U1.6 U1.11 U12.7 U12.8 U12.9 U12.10 U12.11 U12.12 U12.15 U18.1 U18.3 U18.4 U18.5 U18.7 U18.8 U18.9 U18.10 U18.12 U18.14 U68.17 U71.5 U72.4 U72.7 U72.9 U72.10 U72.15 U72.17 U72.24 U72.25 U72.28 U72.29 U72.32 U72.33 U72.34 U72.35 USB2.13 USB2.14 USB2.15 USB2.16 USB2.A8 USB2.B8

## Polygon pours and split planes (outlines as drawn)
GND on Bottom Layer (solid, remove dead copper, pour order 0): 76.2,77.2 135.2,77.2 135.2,135 76.2,135
GND on Top Layer (solid, remove dead copper, pour order 1): 77.8,76.2 136.8,76.2 136.8,134 77.8,134

## Keep-outs
Top Layer:
  region net "": 118.4,78.8 132,78.8 132,93.3 118.4,93.3
Bottom Layer:
  region net "": 118.4,78.8 132,78.8 132,93.3 118.4,93.3
Board Outline Layer:
  lines w0.254 net "": 80.8,82.4 ccw(c83.8,82.4) 83.8,79.4 127.8,79.4 ccw(c127.8,82.4) 130.8,82.4 130.8,126.4 ccw(c127.8,126.4) 127.8,129.4 83.8,129.4 ccw(c83.8,126.4) 80.8,126.4 80.8,82.4

## Other copper
Top Layer:
  region net $4N560: 90.664,122.176 98.064,122.176 98.064,123.376 90.664,123.376
Bottom Layer:
  region net $4N558: 96.38,112.176 97.58,112.176 97.58,115.026 96.38,115.026
  region net $4N560: 88.664,119.977 89.633,119.977 89.633,121.346 88.664,121.346
  region net $4N560: 87.793,120.604 89.264,120.604 89.264,121.376 87.793,121.376
  region net $4N560: 92.463,122.177 98.064,122.177 98.064,123.376 92.463,123.376

## Silkscreen, mask and mechanical layers (free items; w line width, h text height)
Top Solder Mask Layer:
  text "iNixie" at 91.036,83.288 h2.6
  text "DGM01 Kit Board" at 89,80.4 h2